# Altium PCB 6_Channels_TX_V1_PCB.PcbDoc
Units mm, origin at the board's own origin, x right, y up, seen from the top; angles counter-clockwise.
Board outline 100 x 70 mm, 2 copper layers (Top Layer, Bottom Layer); 24 components, 20 nets, 101 pads, 16 vias.
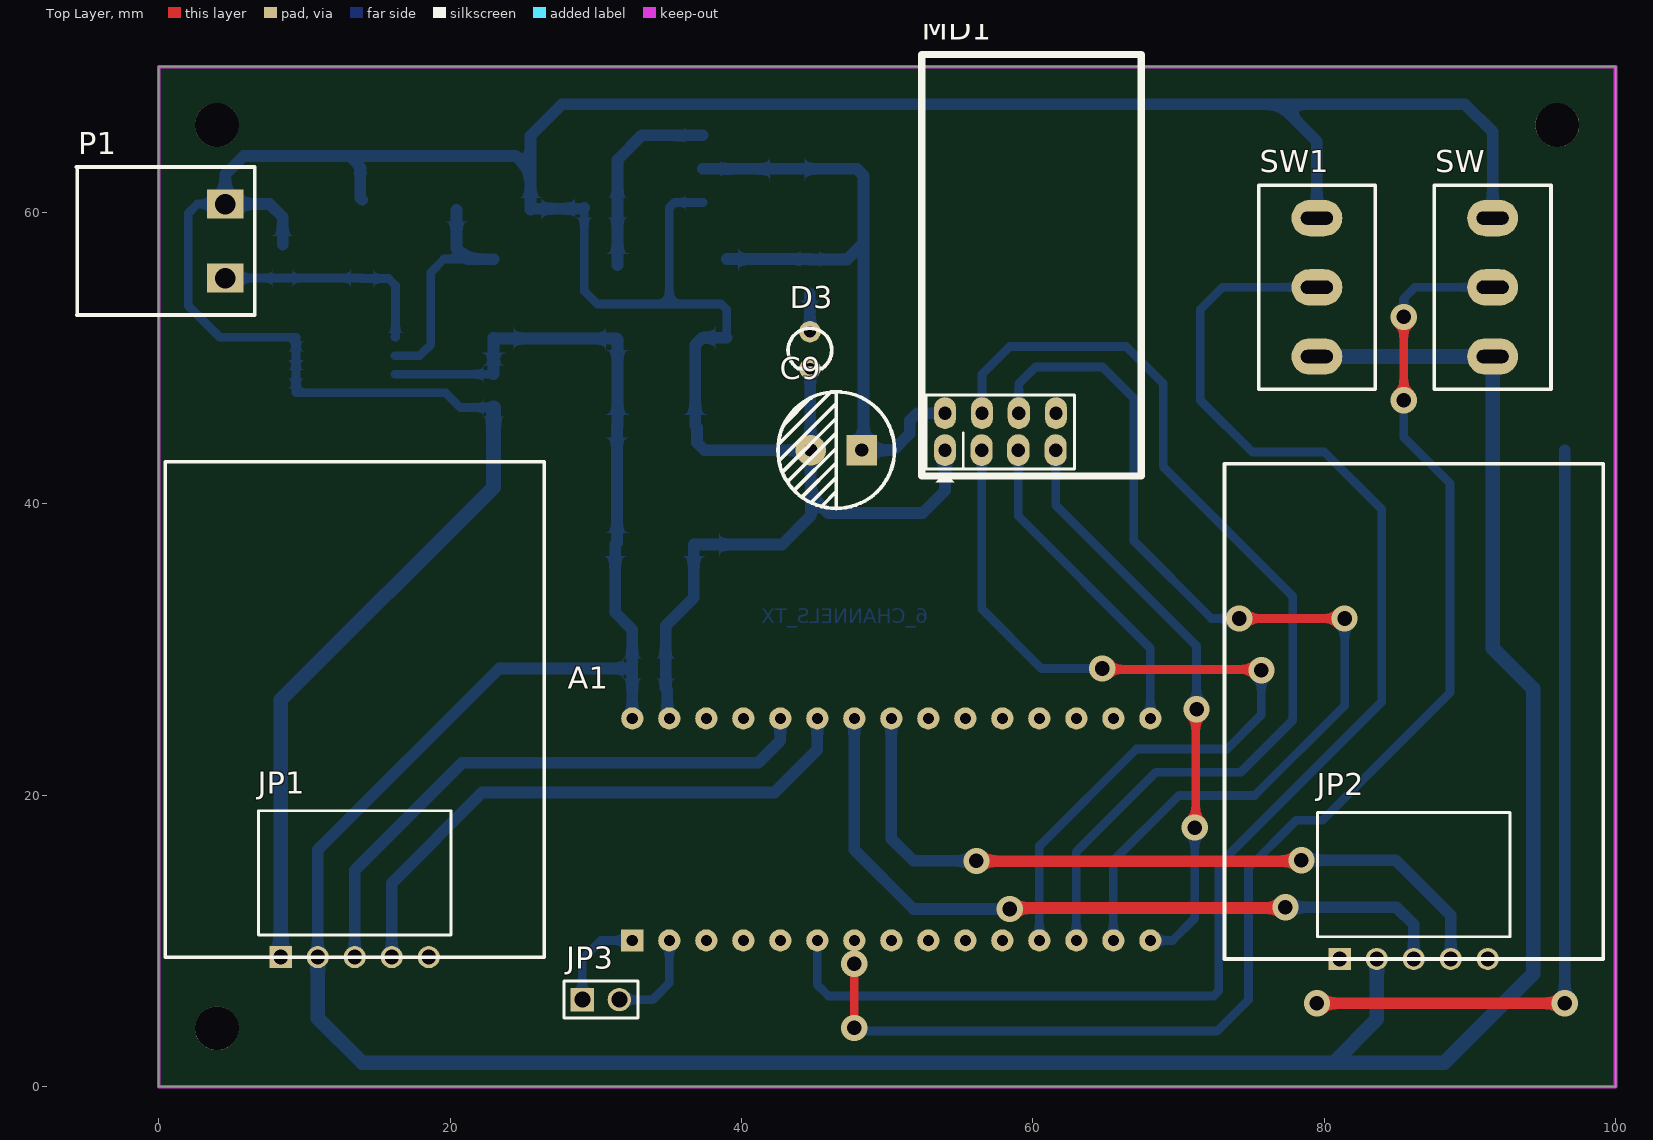
[diagram p0: Top Layer view]
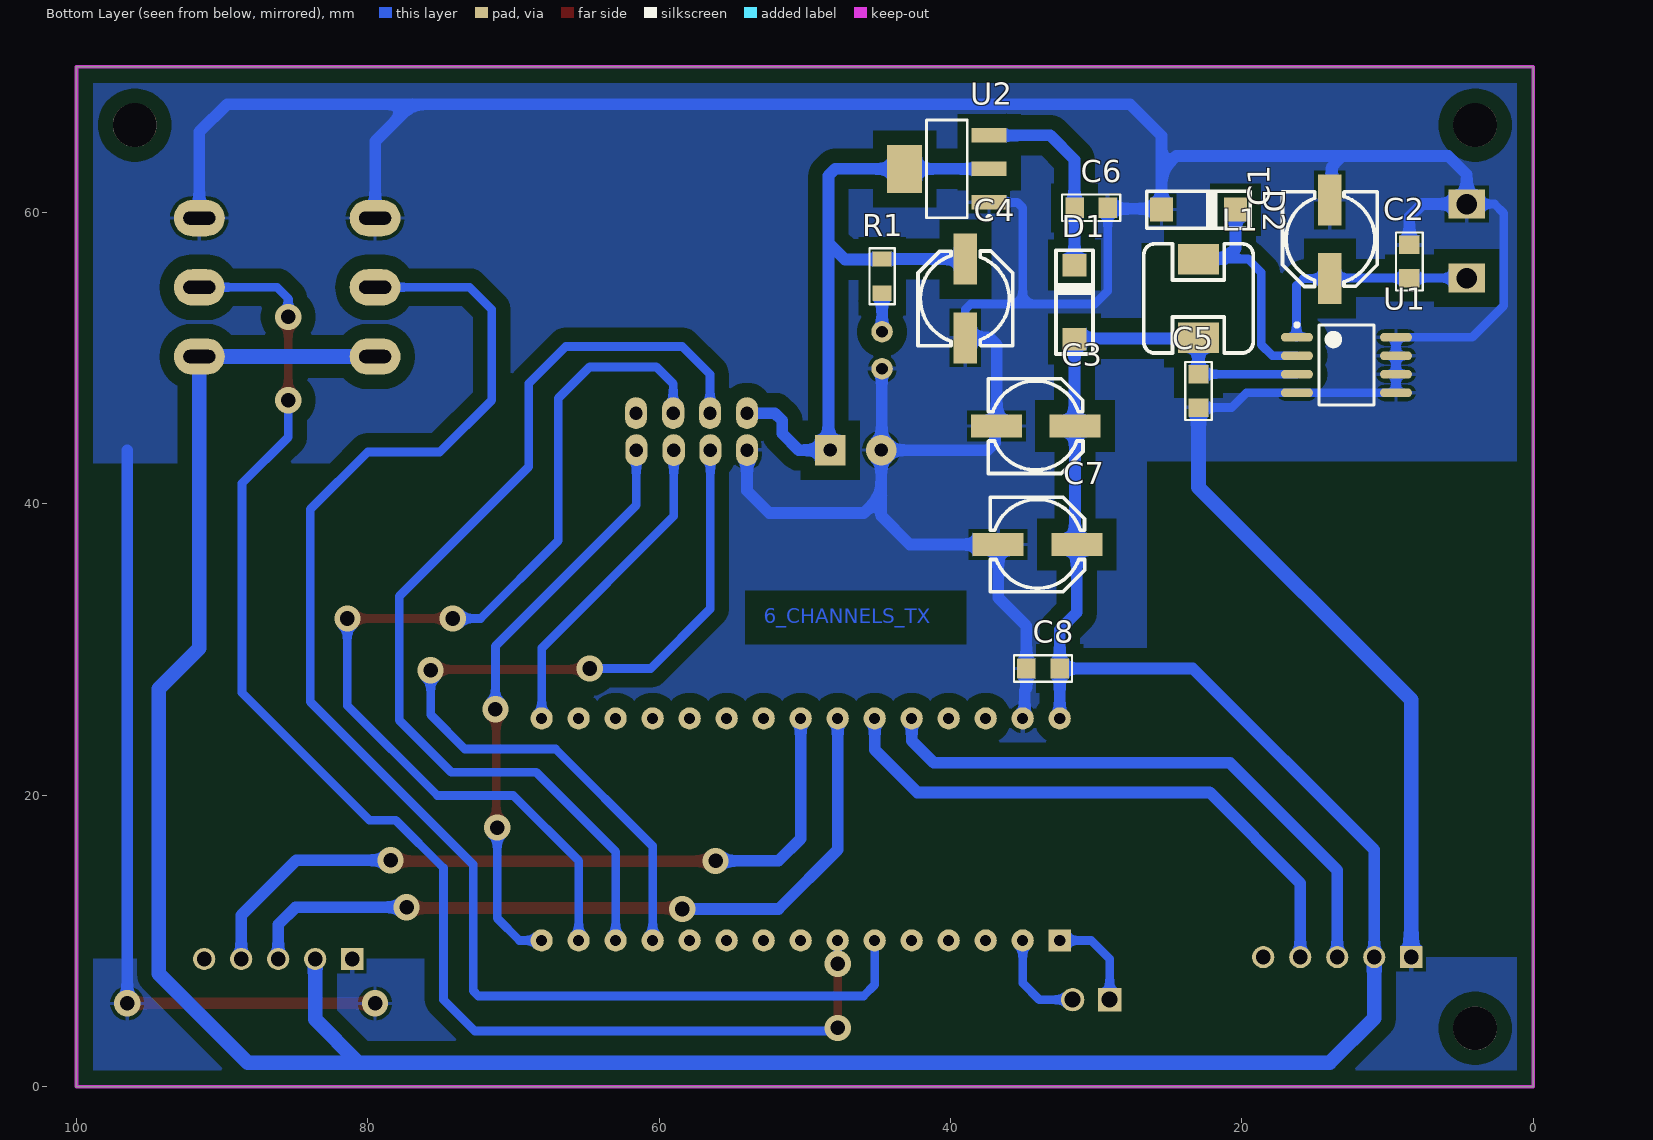
[diagram p1: Bottom Layer view, seen from below]

## Layer stack, top to bottom
Top Solder: solder mask 0.0102, Solder Resist, Dk 3.5
Top Layer: signal copper 0.0356
Dielectric 1: dielectric 0.32, FR-4, Dk 4.8
Bottom Layer: signal copper 0.0356
Bottom Solder: solder mask 0.0102, Solder Resist, Dk 3.5

## Board outline
0,0 0,70 100,70 100,0

## Design rules (kind name [scope] priority, off if disabled: settings)
Clearance [All] p1: gap=1 ignorepadtopadclearanceinfootprint=FALSE
PolygonConnect [All] p1: connectstyle=Relief reliefconductorwidth=0.254 reliefentries=4 polygonreliefangle="90 Angle" airgapwidth=0.254
RoutingVias [All] p1: holewidth=1 width=1.8 viastyle="Through Hole" minholewidth=1 minwidth=1.8 maxholewidth=1 maxwidth=1.8
SolderMaskExpansion [All] p1: expansion=0.102 istentingtop=FALSE
Width [All] p1: maxlimit=1 minlimit=0.6 preferedwidth=0.8
30 further rules are at their usual default settings.

## Components (designator, comment, footprint, x,y, rotation, side; value= is the part's Value field where it differs from the comment)
A1 "Nano" "Arduino nano" 28.448,8.509 r0 top
C1 "100uF/ 35V" "CAP SMD ALUMINUM D8" 13.97,58.166 r180 bottom
C2 "104" SM-0805 8.509,56.642 r270 bottom
C3 "16V/ 220uF" "CAP SMD ALUMINUM D8" 34.163,45.339 r90 bottom
C4 "16V/ 220uF" "CAP SMD ALUMINUM D8" 38.989,54.102 r0 bottom
C5 "104" SM-0805 22.987,47.752 r90 bottom
C6 "104" SM-0805 30.353,60.325 r0 bottom
C7 "16V/ 220uF" "CAP SMD ALUMINUM D8" 34.036,37.211 r90 bottom
C8 "104" SM-0805 33.655,28.702 r180 bottom
C9 "10uF" "tu hoa 8mm" 46.51,43.688 r180 top
D1 "M7" DO-214AC 31.496,53.848 r90 bottom
D2 "SS210" DO-214AC 22.987,60.198 r180 bottom
D3 "LED" "LED-3MM GRE" 44.704,50.546 r270 top value="LED 3 ly Single Colour"
JP1 "JP 1x5 2.54" "JP 1x5 CC" 13.462,8.89 r0 top
JP2 "JP 1x5 2.54" "JP 1x5 CC" 86.154,8.763 r0 top
JP3 "JP 1x2 2.54" "JP 1x2 DT" 29.083,5.969 r0 top
L1 "100uH" "INDUCTOR SMD 7342 7.3X7.3X4.2mm" 22.987,54.102 r270 bottom value="150 mH"
MD1 "NRF24L01 Module" NRF24L01 53.975,43.688 r0 top
P1 "CON 2 EDG5.08" "CON 2 2EDG5.08" 4.572,55.499 r90 top
R1 "1k" "RESISTOR SMD 0805" 44.704,55.626 r270 bottom
SW "SW 3P" MTS-102 91.567,50.114 r90 top
SW1 "SW 3P" MTS-102 79.502,50.114 r90 top
U1 "XL1509" SOP8 12.827,49.53 r180 bottom
U2 "LM1117-3.3V" SOT223-4N 40.259,62.992 r0 bottom

## Footprints (in the part's own frame and the unit in brackets; to place one, negate y for a bottom-side part, rotate by r counter-clockwise, add the part's x,y. Pads: shape width x height; smd on the part's side, far side on the other; paste and mask are expansions set on the pad)
"Arduino nano" [mil] "arduino nano"
  rect 60x60 hole 30: 0(160,60)
  round 60 hole 30: 1(260,60) 2(360,60) 3(460,60) 4(560,60) 5(660,60) 6(760,60) 7(860,60) 8(960,60) 9(1060,60) 10(1160,60) 11(1260,60) 12(1360,60) 13(1460,60) 14(1560,60) 15(1560,660) 16(1460,660) 17(1360,660) 18(1260,660) 19(1160,660) 20(1060,660) 21(960,660) 22(860,660) 23(760,660) 24(660,660) 25(560,660) 26(460,660) 27(360,660) 28(260,660) 29(160,660)
  body extent -25,10 1715,710, height 507
"CAP SMD ALUMINUM D8" [mm] "SMT Aluminum Electrolytic Capacitors, Dimensions 6.3x7.7(DxL)"
  rect 1.6x3.5 smd: 1(0,-2.7) 2(0,2.7)
  silkscreen extent -3.25,-3.25 3.25,3.25, body extent -3.34,-3.52 3.26,3.48, height 7.7
"CON 2 2EDG5.08" [mm]
  rect 2x2.5 hole 1.4: 1(0,0) 2(5.08,0)
  silkscreen extent -2.54,-2.03 7.62,10.21, body extent -2.5,-1.75 7.58,10.25, height 3.15
DO-214AC [mm]
  rect 1.55x1.65 smd: 1(-2.54,0) 2(2.54,0)
  silkscreen extent -3.56,-1.27 3.56,1.27, body extent -2.59,-1.29 2.61,1.31, height 2.4
"INDUCTOR SMD 7342 7.3X7.3X4.2mm" [mm] "Inductor 7342 Body 7.3x7.3X4.2mm, Pad 2.8x2.1mm"
  rect 2.1x2.8 smd: 1(-2.7,0) 2(2.7,0)
  silkscreen extent -3.75,-3.75 3.75,3.75, body extent -3.65,-3.65 3.65,3.65, height 4.8
"JP 1x2 DT" [mm] "2 pins, 1 row, straight, gold plating"
  rect 1.6x1.6 hole 1.1: 1(0,0)
  round 1.6 hole 1.1: 2(2.54,0)
  silkscreen extent -1.27,-1.27 3.81,1.27, body extent -1.27,-1.27 3.81,1.27, height 8.54
"JP 1x5 CC" [mm]
  rect 1.52x1.52 hole 1.02: 1(-5.08,0)
  round 1.52 hole 1.02: 2(-2.54,0) 3(0,0) 4(2.54,0) 5(5.08,0)
  silkscreen extent -6.6,1.52 6.6,10.05, body extent -6.6,-0.25 6.6,10.05, height 2.51
"LED-3MM GRE" [mm]
  round 1.47 hole 0.813: 1(-1.27,0) 2(1.27,0)
  silkscreen extent -1.5,-1.5 1.25,1.5, body extent -1.73,-1.65 1.49,1.65, height 4.72
MTS-102 [mm]
  oval 2.5x3.5 hole 0.9 slot 2.2 at 90 deg: 1(0,0) 2(4.75,0) 3(9.5,0)
  silkscreen extent -2.25,-4 11.75,4, body extent -1.85,-3.7 11.35,4.2, height 28.34
NRF24L01 [mil]
  oval 60x86 hole 36: 1(0,0) 2(0,100) 3(99,0) 4(100,100) 5(198,0) 6(199.5,100) 7(299,0) 8(300,100)
  silkscreen extent -63,-86 530,1069, body extent -73,-74 518,1068, height 588
"RESISTOR SMD 0805" [mm]
  rect 1.05x1.3 smd: 1(-1.177,0) 2(1.177,0)
  Top Layer pour cut-out: -0.584,0.864 0.584,0.864 0.584,-0.864 -0.584,-0.864
  silkscreen extent -1.92,-0.86 1.92,0.86, body extent -1,-0.62 1,0.63, height 0.5
SM-0805 [mil] "Compoment SMD 80x50mil"
  rect 50x55 smd: 1(-45,0) 2(45,0)
  Top Layer pour cut-out: -18,36 18,36 18,-36 -18,-36
  silkscreen extent -78,-36 78,36, body extent -40,-25 40,25, height 24
SOP8 [mm] "8-Pin Small Outline Package 1.27 mm Pitch, IPC Medium Density"
  oval 2.2x0.6 smd: 1(-3.4,1.905) 2(-3.4,0.635) 3(-3.4,-0.635) 4(-3.4,-1.905) 5(3.4,-1.905) 6(3.4,-0.635) 7(3.4,0.635) 8(3.4,1.905)
  silkscreen extent -3.52,-2.75 1.9,2.88, body extent -3.02,-2.51 3.02,2.51, height 1.6
SOT223-4N [mm] "SOT223, 4-Leads, Body 6.5x3.5mm, Pitch 2.3mm, Lead Span 7mm, IPC Medium Density"
  rect 2.4x1 smd: 1(-2.9,2.3) 2(-2.9,0) 3(-2.9,-2.3)
  rect 2.4x3.3 smd: 4(2.9,0)
  silkscreen extent -3.02,-3.35 1.4,3.47, body extent -3.39,-3.27 3.5,3.23, height 1.72
"tu hoa 8mm" [mm]
  rect 2.1x2.1 hole 0.9: 1(-1.75,0)
  round 2.1 hole 0.9: 2(1.75,0)
  silkscreen extent -4,-4 4,4, body extent -4.1,-4.07 4.1,4.13, height 13.81

## Part data
A1: library part "Arduino Nano"
C1 C3 C4 C7: library part Cap_Polar
C2 C5 C6 C8: library part Cap_Non-Polar
C9: library part "Tu Hoa 100uF 35V 8x11", "Cắm", Chung_Loai=Cắm, Don_Vi=Con, Ma_Hang=MH002807, So_Chan=2, Ten_Linh_Kien="Tụ Hóa 100uF 35V 8x11MM"
D1: library part "Diode Standard", "Diode Standard", Part Number="LED 3 ly Single Colour"
D2: library part "Diode Schottky", "Diode Schottky", Part Number="LED 3 ly Single Colour"
D3: "LED Single"
JP1 JP2: library part "JP 1x5 2.54 Cai Cong", "Cắm", Chung_Loai=Cắm, Don_Vi=Con, Ma_Hang=MH001265, Ten_Linh_Kien="Jump Đơn Cái 2.54MM 1x40P Cong"
JP3: library part "JP 1x2 2.54 Duc Thang", "Cắm", Chung_Loai=Cắm, Don_Vi=Con, Ma_Hang=MH000903, Ten_Linh_Kien="Jump Đơn Đực 2.54MM 1x40P Thẳng 11MM"
L1: library part "Inductor Iron", "Magnetic-Core Inductor"
P1: "Cắm", Chung_Loai=Cắm, Don_Vi=Con, Ma_Hang=MH000759, Ten_Linh_Kien="CON 2 2EDG5.08-2P 5.08MM ( Xanh Cong)"
R1: library part Resistor
U1: "IC power sop8"
U2: library part LM1117, "800mA Low-Dropout Linear Regulator", Creator="Nguyen Ba Bien", Website=http://group3i.net

## Free pads (board coordinates)
  round 3 hole 3: 2(4,4) 2(4,66) 2(96,66)

## Via types
v1: diameter 1.8, hole 1, Top Layer to Bottom Layer, 16 vias

## Nets (pads, with @x,y where several pads share a name; then routed paths per layer and width w, separated by ;. In a path a pad name is that pad's centre, name@x,y a point inside that pad or via, vN(x,y) a via of type N, cw(c..) or ccw(c..) an arc to the next point about the centre after c; other vN are vias at no path point)
+3.3V: C4.1 C9.1 MD1.2 R1.1 U2.2 U2.4 | length 47.3
  Bottom Layer w0.8: U2.2 U2.4 47.918,62.992 48.387,62.523 48.387,57.912 ; C4.1 38.99,56.803 R1.1 44.738,56.769 47.244,56.769 48.387,57.912 ; MD1.2 52.07,46.228 51.562,45.72 51.562,44.831 50.419,43.688 C9.1 48.387,43.815 48.387,57.912
+5V: A1.29 C3.1 C5.2 C7.1 C8.2 D1.1 JP1.2 JP2.2 L1.2 SW1.1 SW.1 U1.3 | length 233.9
  Bottom Layer w0.6: U1.3 C5.2
  Bottom Layer w0.8: JP1.2 10.922,16.256 23.368,28.702 C8.2 ; C5.2 L1.2 23.034,51.355 31.449,51.355 D1.1 31.496,45.372 C3.1 31.463,37.338 C7.1 31.336,32.545 32.512,31.369 C8.2 ; A1.29 C8.2
  Bottom Layer w1: JP1.2 10.922,4.699 13.994,1.627 80.645,1.627 88.241,1.627 94.361,7.747 94.361,27.305 91.567,30.099 SW.1 SW1.1 ; 80.645,1.651 83.614,4.62 JP2.2
+12V: C1.1 C2.2 P1.1 U1.1 | length 15.5
  Bottom Layer w0.6: P1.1 C2.2 13.937,55.499 C1.1 15.781,55.466 16.256,54.991 16.256,51.435 U1.1
CE: A1.11 MD1.3 | length 60.3
  Top Layer w0.6: v1(64.77,28.702) 64.834,28.639 75.629,28.639 v1(75.692,28.575)
  Bottom Layer w0.6: MD1.3 56.49,32.791 60.579,28.702 v1(64.77,28.702) ; A1.11 60.452,16.51 67.122,23.18 73.345,23.18 75.692,25.527 v1(75.692,28.575)
CH5: A1.6 SW.2 | length 96.7
  Top Layer w0.6: v1(47.752,4.027) v1(47.752,8.427) ; v1(85.471,47.117) v1(85.471,52.832)
  Bottom Layer w0.6: v1(47.752,4.027) 47.969,3.81 72.644,3.81 74.803,5.969 74.803,15.009 78.082,18.288 79.883,18.288 88.646,27.051 88.646,41.402 85.471,44.577 v1(85.471,47.117) ; v1(47.752,8.427) A1.6 ; v1(85.471,52.832) 85.471,54.102 86.233,54.864 SW.2
CH6: A1.5 SW1.2 | length 99.2
  Bottom Layer w0.6: A1.5 45.212,6.985 45.974,6.223 46.837,6.223 46.841,6.227 48.663,6.227 48.667,6.223 72.42,6.223 72.771,6.574 72.771,15.24 83.947,26.416 83.947,39.624 80.01,43.561 75.057,43.561 71.501,47.117 71.501,53.34 73.025,54.864 SW1.2
CSN: A1.12 MD1.4 | length 68.4
  Bottom Layer w0.6: MD1.4 56.515,48.895 58.42,50.8 66.421,50.8 68.961,48.26 68.961,42.545 77.851,33.655 77.851,25.146 74.285,21.58 68.443,21.58 62.992,16.129 A1.12
GND: A1.28 C1.2 C2.1 C3.2 C4.2 C5.1 C6.1 C7.2 C8.1 C9.2 D2.1 D3.2 JP1.1 JP2.1 MD1.1 P1.2 SW1.3 SW.3 U1.4 U1.5 U1.6 U1.7 U1.8 U2.1 | length 348
  Top Layer w0.8: v1(79.502,5.715) v1(96.52,5.715)
  Bottom Layer w0.6: P1.2 2.667,60.579 2.032,59.944 2.032,53.594 4.191,51.435 U1.8 U1.7 U1.6 U1.5 U1.4 19.685,47.625 20.701,46.609 C5.1 ; C6.1 29.21,54.61 30.099,53.721 35.052,53.721 ; U2.1 35.419,60.692 35.052,60.325 35.052,53.721 ; C4.2 38.989,53.34 38.608,53.721 35.052,53.721
  Bottom Layer w0.8: C2.1 8.509,59.69 7.62,60.579 P1.2 4.572,62.611 5.842,63.881 13.12,63.881 ; C1.2 13.843,60.993 13.843,63.119 13.589,63.373 13.589,63.412 13.12,63.881 ; C6.1 29.146,60.261 25.59,60.261 D2.1 25.527,62.865 ; A1.28 34.913,25.412 34.913,27.19 34.798,27.305 C8.1 34.798,31.623 36.736,33.561 C7.2 42.799,37.211 44.76,39.172 44.76,40.584 ; C4.2 37.305,51.402 36.83,50.927 36.83,45.372 C3.2 36.957,45.245 36.957,44.196 37.465,43.688 C9.2 ; D3.2 44.732,49.248 44.732,43.716 C9.2 ; MD1.1 53.975,40.894 52.451,39.37 45.974,39.37 44.76,40.584 ; SW1.3 79.502,64.897 76.962,67.437 ; SW.3 91.567,65.532 89.662,67.437 76.962,67.437 ; v1(96.52,5.715) 96.52,43.688 ; 13.12,63.881 24.511,63.881 25.527,62.865 ; 25.527,62.865 25.527,65.278 27.686,67.437 76.962,67.437 ; 44.76,40.584 C9.2
  Bottom Layer w1: JP1.1 8.382,26.543 22.987,41.148 C5.1
MISO: A1.14 MD1.7 | length 39.9
  Top Layer w0.6: v1(71.12,17.78) 71.183,17.843 71.183,25.845 v1(71.247,25.908)
  Bottom Layer w0.6: MD1.7 61.57,39.903 71.247,30.226 v1(71.247,25.908) ; A1.14 69.596,10.033 71.12,11.557 v1(71.12,17.78)
MOSI: A1.13 MD1.6 | length 69.5
  Top Layer w0.6: v1(74.168,32.131) v1(81.407,32.131)
  Bottom Layer w0.6: MD1.6 59.042,48.247 60.198,49.403 64.77,49.403 66.929,47.244 66.929,37.465 72.263,32.131 v1(74.168,32.131) ; A1.13 65.532,15.494 70.018,19.98 75.225,19.98 81.407,26.162 v1(81.407,32.131)
NetC6_2: C6.2 D1.2 U2.3 | length 13.8
  Bottom Layer w0.8: D1.2 C6.2 31.496,63.627 33.161,65.292 U2.3
NetD2_2: D2.2 L1.1 U1.2 | length 16.1
  Bottom Layer w0.6: U1.2 17.907,50.165 18.669,50.927 18.669,55.88 19.591,56.802 21.176,56.802
  Bottom Layer w0.8: D2.2 20.447,57.531 21.176,56.802 L1.1
NetD3_1: D3.1 R1.2 | length 2.6
  Bottom Layer w0.8: D3.1 R1.2
RXD: A1.1 JP3.2 | length 6.8
  Bottom Layer w0.6: JP3.2 33.909,5.969 35.052,7.112 A1.1
SCK: A1.15 MD1.5 | length 22.2
  Bottom Layer w0.6: MD1.5 59.004,39.167 68.072,30.099 A1.15
TXD: A1.0 JP3.1 | length 6.7
  Bottom Layer w0.6: JP3.1 29.083,8.763 30.353,10.033 A1.0
VRX_L: A1.25 JP1.3 | length 40.4
  Bottom Layer w0.8: JP1.3 13.462,14.859 20.828,22.225 41.148,22.225 42.672,23.749 A1.25
VRX_R: A1.23 JP2.3 | length 52
  Top Layer w0.8: v1(58.42,12.192) 58.483,12.255 77.279,12.255 v1(77.343,12.319)
  Bottom Layer w0.8: A1.23 47.752,16.256 51.816,12.192 v1(58.42,12.192) ; v1(77.343,12.319) 84.963,12.319 86.154,11.128 JP2.3
VRY_L: A1.24 JP1.4 | length 40.2
  Bottom Layer w0.8: JP1.4 16.002,13.97 22.225,20.193 42.291,20.193 45.212,23.114 A1.24
VRY_R: A1.22 JP2.4 | length 51.9
  Top Layer w0.8: v1(56.134,15.494) 56.148,15.48 78.385,15.48 v1(78.443,15.537)
  Bottom Layer w0.8: A1.22 50.292,17.018 51.816,15.494 v1(56.134,15.494) ; v1(78.443,15.537) 84.92,15.537 88.694,11.763 JP2.4
pads on no net: A1.2 A1.3 A1.4 A1.7 A1.8 A1.9 A1.10 A1.16 A1.17 A1.18 A1.19 A1.20 A1.21 A1.26 A1.27 JP1.5 JP2.5 MD1.8

## Polygon pours and split planes (outlines as drawn)
GND on Bottom Layer "GND_L02_P000" (solid, remove dead copper, pour order 0): 0,69.977 99.949,69.977 99.949,0 0,0

## Keep-outs
Keep-Out Layer:
  the board outline again, w0.254

## Other copper
Bottom Layer:
  pour cut-out: 19.177,57.912 26.924,57.912 26.924,50.292 19.177,50.292
  pour cut-out: 73.152,42.799 99.187,42.799 99.187,8.763 73.152,8.763
  pour cut-out: 26.543,42.926 26.543,9.017 26.416,8.89 0.508,8.89 0.508,42.926
  text "6_CHANNELS_TX" at 52.832,31.79 h1

## Silkscreen, mask and mechanical layers (free items; w line width, h text height)
Top Overlay:
  lines w0.254: 0.462,8.89 0.462,42.89 26.462,42.89 26.462,8.89 13.462,8.89 0.462,8.89 ; 73.154,8.763 73.154,42.763 99.154,42.763 99.154,8.763 86.154,8.763 73.154,8.763